# EAGLE board Circuit 5 using DIL (EAGLE 5.06)
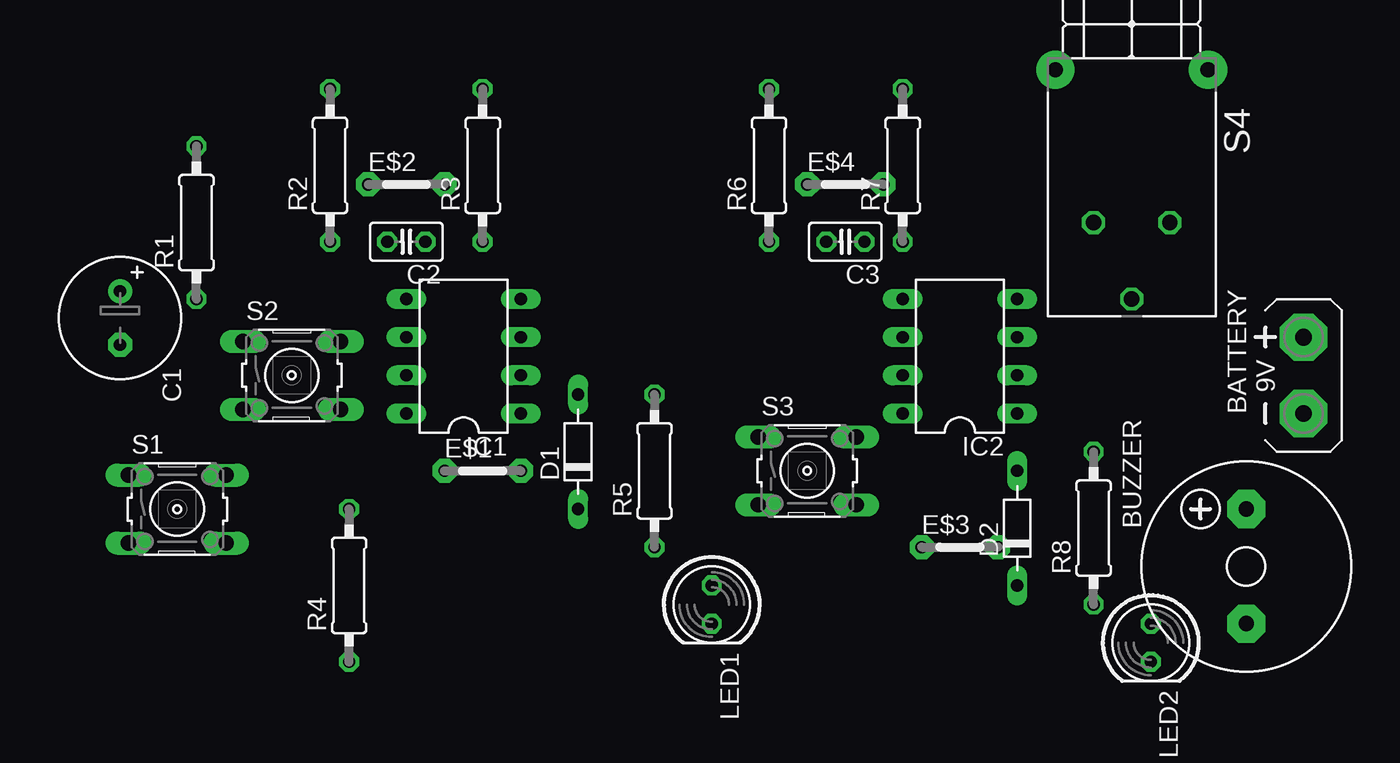
[diagram p0: board, top side]
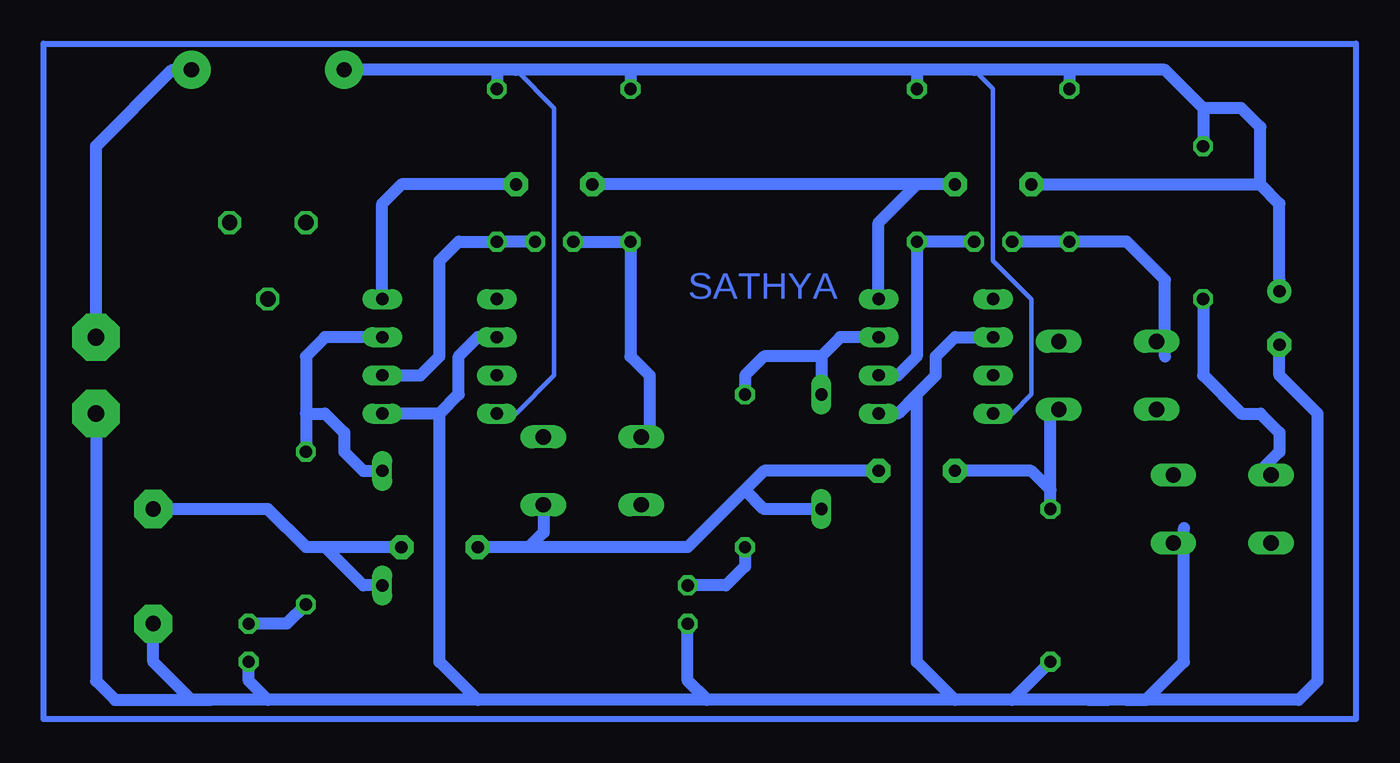
[diagram p1: board, bottom side, seen from below]

No outline drawn. Coordinates in mm, seen from the top.
Copper layers (1*16): Top 0.035mm / dielectric 1.5mm / Bottom 0.035mm
Design rules "default": minimum track width 10mil, minimum drill 24mil, track to track 8mil, track to pad 8mil, pad to pad 8mil, via to via 8mil, smd to smd 8mil, copper to edge 40mil, drill to drill 8mil, minimum pad ring 10mil, minimum via ring 8mil, stop-mask expansion 4mil, vias tented up to drill 0mil, thermal gap 10mil

## Footprints (pad centres in the part's own frame; a part is rotated, then mirrored left to right if it is on the bottom)
AB9V = drill 1.118 pad 3.15 octagon: + 0,2.54; - 0,-2.54
F/CM12P = drill 1.016 pad 2.54 octagon: + 3.81,0; - -3.81,0
E3,5-8 = drill 0.813 pad 1.6 round: + -1.778,0 | drill 0.813 pad 1.6 octagon: - 1.778,0
C025-025X050 = drill 0.813 octagon: 1 -1.27,0; 2 1.27,0
D-7.5 = drill 0.813 long: A 3.81,0; C -3.81,0
05 = drill 0.813 pad 1.6 octagon: 1 -2.54,0; 2 2.54,0
DIL08 = drill 0.813 long: 1 -3.81,-3.81; 2 -1.27,-3.81; 3 1.27,-3.81; 4 3.81,-3.81; 5 3.81,3.81; 6 1.27,3.81; 7 -1.27,3.81; 8 -3.81,3.81
LED5MM = drill 0.813 octagon: A -1.27,0; K 1.27,0
0207/10 = drill 0.813 octagon: 1 -5.08,0; 2 5.08,0
B3F-10XX = drill 1.016 long: 1 -3.251,2.261; 2 3.251,2.261; 3 -3.251,-2.261; 4 3.251,-2.261
316-917 = drill 1.016 octagon: 1 10.16,2.54; 2 15.24,0; 3 10.16,-2.54 | drill 1.016 pad 2.54 round: B 0,-5.08; B1 0,5.08

## Placement (x,y rotation side)
BATTERY  [AB9V]  90.17,25.4 0 top
BUZZER  [F/CM12P]  86.36,12.7 90 top
C1  [E3,5-8]  11.43,29.21 270 top
C2  [C025-025X050]  30.48,34.29 180 top
C3  [C025-025X050]  59.69,34.29 180 top
D1  [D-7.5]  41.91,20.32 90 top
D2  [D-7.5]  71.12,15.24 90 top
E$1  [05]  35.56,19.05 0 top
E$2  [05]  30.48,38.1 0 top
E$3  [05]  67.31,13.97 0 top
E$4  [05]  59.69,38.1 0 top
IC1  [DIL08]  34.29,26.67 90 top
IC2  [DIL08]  67.31,26.67 90 top
LED1  [LED5MM]  50.8,10.16 270 top
LED2  [LED5MM]  80.01,7.62 270 top
R1  [0207/10]  16.51,35.56 90 top
R2  [0207/10]  25.4,39.37 90 top
R3  [0207/10]  35.56,39.37 90 top
R4  [0207/10]  26.67,11.43 90 top
R5  [0207/10]  46.99,19.05 90 top
R6  [0207/10]  54.61,39.37 90 top
R7  [0207/10]  63.5,39.37 90 top
R8  [0207/10]  76.2,15.24 90 top
S1  [B3F-10XX]  15.24,16.51 0 top
S2  [B3F-10XX]  22.86,25.4 0 top
S3  [B3F-10XX]  57.15,19.05 0 top
S4  [316-917]  78.74,45.72 270 top

## Library data of the parts
BATTERY = battery
BUZZER = buzzer
C1-C3 R1-R8 = rcl
D1 D2 = diode
E$1-E$4 = jumper
IC1 IC2 = ic-package
LED1 LED2 = led
S1-S3 = switch-omron
S4 = switch

## Nets
S$2: LED2.A R8.1
S$3: BATTERY.+ S4.B1
S$4: LED1.A R5.1
S$5: E$1.1 R4.2
S$6: BUZZER.+ D2.C E$3.2
S$7: E$2.2 E$4.1 IC1.4
S$8: C2.2 R2.1
S$9: C2.1 IC1.2 R3.1
S$10: R1.1
S$11: C3.2 R6.1
S$12: D1.A IC1.3 R5.2
S$13: C3.1 IC2.2 R7.1
S$14: D2.A IC2.3 R8.2
S$16: E$2.1 IC1.8 IC2.8 R1.2 R2.2 R3.2 R6.2 R7.2 S4.B
S$17: E$4.2 IC2.4
S$18: D1.C E$1.2 E$3.1
S$19: BATTERY.- BUZZER.- IC1.1 IC1.6 IC2.1 IC2.6 LED1.K LED2.K R4.1

## Tracks (layer width: path | path; a pad name or v marks a point on that pad's centre or on a via)
S$1
  Bottom 0.406: 6.35,2.54 93.65,2.54 93.65,47.46 6.35,47.46 6.35,2.54
S$2
  Bottom 0.813: R8.1 77.47,8.89 LED2.A
S$3
  Bottom 0.813: S4.B1 85.09,45.72 90.17,40.64 BATTERY.+
S$4
  Bottom 0.813: R5.1 46.99,12.7 48.26,11.43 LED1.A
S$5
  Bottom 0.813: 25.4,22.86 26.67,22.86 26.67,17.78 | 26.67,17.78 27.94,19.05 E$1.1 | R4.2 26.67,17.78
S$6
  Bottom 0.813: BUZZER.+ 78.74,16.51 76.2,13.97 74.93,13.97 | E$3.2 74.93,13.97 | D2.C 72.39,11.43 74.93,13.97
S$7
  Bottom 0.813: 35.56,38.1 38.1,35.56 IC1.4 | 35.56,38.1 E$4.1 | E$2.2 35.56,38.1
S$8
  Bottom 0.813: 19.05,26.67 19.05,31.75 21.59,34.29 R2.1 C2.2
S$9
  Bottom 0.813: C2.1 R3.1 35.56,26.67 36.83,25.4 IC1.2
S$10
  Bottom 0.813: R1.1 16.51,25.4 13.97,22.86 12.7,22.86 11.43,21.59 11.43,20.32 12.7,19.05
S$11
  Bottom 0.813: C3.2 R6.1 54.61,26.67 53.34,25.4 53.34,21.59
S$12
  Bottom 0.813: IC1.3 40.64,27.94 41.91,26.67 | 41.91,26.67 D1.A | 41.91,26.67 45.72,26.67 46.99,25.4 R5.2
S$13
  Bottom 0.813: IC2.2 68.58,25.4 67.31,26.67 67.31,33.02 66.04,34.29 R7.1 C3.1
S$14
  Bottom 0.813: IC2.3 74.93,27.94 76.2,26.67 76.2,22.86 | 76.2,22.86 R8.2 | 76.2,22.86 74.93,22.86 73.66,21.59 73.66,20.32 72.39,19.05 D2.A
S$15
  Bottom 0.813: 60.39,16.79 60.39,14.96 61.19,14.16
S$16
  Bottom 0.305: IC2.8 62.23,22.86 59.69,25.4 59.69,43.18 62.23,45.72 | IC1.8 29.21,22.86 27.94,24.13 27.94,30.48 30.48,33.02 30.48,44.45 31.75,45.72
  Bottom 0.813: 63.5,45.72 S4.B | 63.5,45.72 R7.2 | 63.5,45.72 62.23,45.72 54.61,45.72 | 54.61,45.72 R6.2 | 35.56,45.72 54.61,45.72 | 35.56,45.72 R3.2 | 35.56,45.72 31.75,45.72 25.4,45.72 | 25.4,45.72 R2.2 | 25.4,45.72 19.05,45.72 16.51,43.18 | 16.51,43.18 R1.2 | 16.51,43.18 13.97,43.18 12.7,41.91 12.7,38.1 | 12.7,38.1 11.43,36.83 11.43,31.75 | E$2.1 12.7,38.1
S$17
  Bottom 0.813: IC2.4 71.12,36.83 69.85,38.1 E$4.2
S$18
  Bottom 0.813: 46.99,17.78 45.72,19.05 E$1.2 | 46.99,17.78 50.8,13.97 E$3.1 | D1.C 45.72,16.51 46.99,17.78
S$19
  Bottom 0.813: BATTERY.- 90.17,5.08 88.9,3.81 82.55,3.81 | IC2.6 64.77,27.94 66.04,26.67 66.04,24.13 67.31,22.86 | IC1.6 33.02,27.94 34.29,26.67 34.29,25.4 35.56,24.13 | BUZZER.- 86.36,6.35 83.82,3.81 82.55,3.81 | LED2.K 80.01,5.08 78.74,3.81 | 67.31,22.86 IC2.1 | IC1.1 36.83,22.86 35.56,24.13 | 67.31,22.86 67.31,6.35 64.77,3.81 | 78.74,3.81 82.55,3.81 | LED1.K 50.8,5.08 49.53,3.81 | 64.77,3.81 78.74,3.81 | 35.56,24.13 35.56,6.35 33.02,3.81 | 49.53,3.81 64.77,3.81 | 33.02,3.81 49.53,3.81 | 17.78,15.24 17.78,6.35 20.32,3.81 21.59,3.81 | 29.21,3.81 33.02,3.81 | 29.21,3.81 R4.1 | 11.43,27.94 11.43,25.4 8.89,22.86 8.89,5.08 10.16,3.81 21.59,3.81 | 24.13,3.81 22.86,3.81 | 24.13,3.81 29.21,3.81 | 21.59,3.81 24.13,3.81

## Text on the board
Bottom: SATHYA